# EAGLE board Shifter (EAGLE 7.5.0)

Size 50 x 30 mm. Coordinates in mm from the lower left corner, seen from the top.
Outline: 0,30 50,30 50,0 0,0 0,30
Outline: circle at 8,25 radius 3.1
Outline: circle at 42,25 radius 3.1
Outline: circle at 8,5 radius 3.1
Copper layers (1*16): Top 0.035mm / dielectric 1.5mm / Bottom 0.035mm
Design rules "default": minimum track width 10mil, minimum drill 24mil, track to track 8mil, track to pad 8mil, pad to pad 8mil, via to via 8mil, smd to smd 8mil, copper to edge 40mil, drill to drill 8mil, minimum pad ring 10mil, minimum via ring 8mil, stop-mask expansion 4mil, vias tented up to drill 0mil, thermal gap 10mil

## Footprints (pad centres in the part's own frame; a part is rotated, then mirrored left to right if it is on the bottom)
0805 = smd 0.8 x 1.2: 1 -0.9,0; 2 0.9,0
TQFP32-08 = smd 1.27 x 0.559: 1 -4.293,2.8; 2 -4.293,2; 3 -4.293,1.2; 4 -4.293,0.4; 5 -4.293,-0.4; 6 -4.293,-1.2; 7 -4.293,-2; 8 -4.293,-2.8; 17 4.293,-2.8; 18 4.293,-2; 19 4.293,-1.2; 20 4.293,-0.4; 21 4.293,0.4; 22 4.293,1.2; 23 4.293,2; 24 4.293,2.8 | smd 0.559 x 1.27: 9 -2.8,-4.293; 10 -2,-4.293; 11 -1.2,-4.293; 12 -0.4,-4.293; 13 0.4,-4.293; 14 1.2,-4.293; 15 2,-4.293; 16 2.8,-4.293; 25 2.8,4.293; 26 2,4.293; 27 1.2,4.293; 28 0.4,4.293; 29 -0.4,4.293; 30 -1.2,4.293; 31 -2,4.293; 32 -2.8,4.293
RESONATOR-SMD = smd 0.45 x 1.905: 1 -1.2,0; 2 0,0; 3 1.2,0

## Placement (x,y rotation side)
R1  [0805]  22.46,17.54 0 top
R2  [0805]  18.65,17.54 0 top
R3  [0805]  14.84,17.54 0 top
R4  [0805]  11.03,17.54 0 top
U1  ATMEGA328P_TQFP  [TQFP32-08]  26.62,10.16 0 top
Y2  16MHZ  [RESONATOR-SMD]  18.84,9.32 270 top

## Library data of the parts
R1-R4 = SparkFun-Resistors
U1 = SparkFun-DigitalIC; PROD_ID: IC-09069
Y2 = SparkFun-FreqCtrl; PROD_ID: XTAL-08900

## Nets
GND: U1.3 U1.5 U1.21
N$1: R1.2 U1.17
N$2: R3.2 U1.28
N$3: R2.2 U1.27
N$4: U1.7 Y2.1
N$5: U1.8 Y2.3

## Tracks (layer width: path | path; a pad name or v marks a point on that pad's centre or on a via)
GND  (2 unrouted)
N$1  (1 unrouted)
N$2  (1 unrouted)
N$3  (1 unrouted)
N$4  (1 unrouted)
N$5  (1 unrouted)